# EAGLE board logo (EAGLE 5.04)
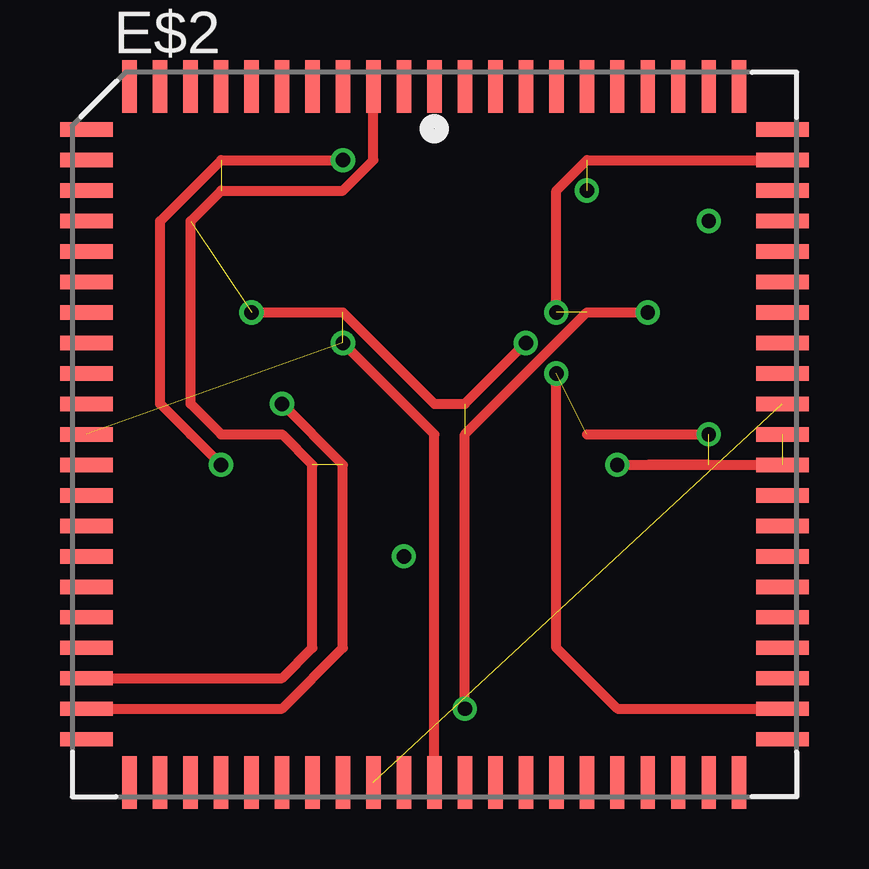
[diagram p0: board, top side]
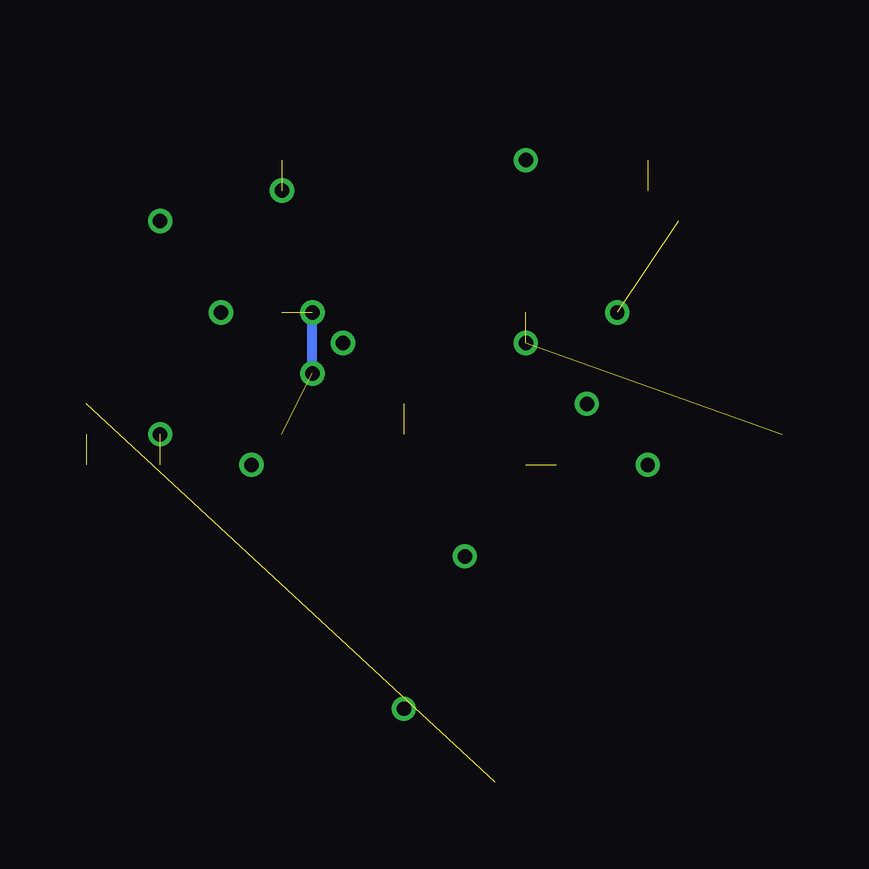
[diagram p1: board, bottom side, seen from below]

No outline drawn. Coordinates in mm, seen from the top.
Copper layers (1*16): Top 0.035mm / dielectric 1.5mm / Bottom 0.035mm
Design rules "default": minimum track width 10mil, minimum drill 24mil, track to track 8mil, track to pad 8mil, pad to pad 8mil, via to via 8mil, smd to smd 8mil, copper to edge 40mil, drill to drill 8mil, minimum pad ring 10mil, minimum via ring 8mil, stop-mask expansion 4mil, vias tented up to drill 0mil, thermal gap 10mil

## Footprints (pad centres in the part's own frame; a part is rotated, then mirrored left to right if it is on the bottom)
PLCC84 = smd 0.6 x 2.2: 1 0,14.5; 2 -1.27,14.5; 3 -2.54,14.5; 4 -3.81,14.5; 5 -5.08,14.5; 6 -6.35,14.5; 7 -7.62,14.5; 8 -8.89,14.5; 9 -10.16,14.5; 10 -11.43,14.5; 11 -12.7,14.5; 33 -12.7,-14.5; 34 -11.43,-14.5; 35 -10.16,-14.5; 36 -8.89,-14.5; 37 -7.62,-14.5; 38 -6.35,-14.5; 39 -5.08,-14.5; 40 -3.81,-14.5; 41 -2.54,-14.5; 42 -1.27,-14.5; 43 0,-14.5; 44 1.27,-14.5; 45 2.54,-14.5; 46 3.81,-14.5; 47 5.08,-14.5; 48 6.35,-14.5; 49 7.62,-14.5; 50 8.89,-14.5; 51 10.16,-14.5; 52 11.43,-14.5; 53 12.7,-14.5; 75 12.7,14.5; 76 11.43,14.5; 77 10.16,14.5; 78 8.89,14.5; 79 7.62,14.5; 80 6.35,14.5; 81 5.08,14.5; 82 3.81,14.5; 83 2.54,14.5; 84 1.27,14.5 | smd 2.2 x 0.6: 12 -14.5,12.7; 13 -14.5,11.43; 14 -14.5,10.16; 15 -14.5,8.89; 16 -14.5,7.62; 17 -14.5,6.35; 18 -14.5,5.08; 19 -14.5,3.81; 20 -14.5,2.54; 21 -14.5,1.27; 22 -14.5,0; 23 -14.5,-1.27; 24 -14.5,-2.54; 25 -14.5,-3.81; 26 -14.5,-5.08; 27 -14.5,-6.35; 28 -14.5,-7.62; 29 -14.5,-8.89; 30 -14.5,-10.16; 31 -14.5,-11.43; 32 -14.5,-12.7; 54 14.5,-12.7; 55 14.5,-11.43; 56 14.5,-10.16; 57 14.5,-8.89; 58 14.5,-7.62; 59 14.5,-6.35; 60 14.5,-5.08; 61 14.5,-3.81; 62 14.5,-2.54; 63 14.5,-1.27; 64 14.5,0; 65 14.5,1.27; 66 14.5,2.54; 67 14.5,3.81; 68 14.5,5.08; 69 14.5,6.35; 70 14.5,7.62; 71 14.5,8.89; 72 14.5,10.16; 73 14.5,11.43; 74 14.5,12.7

## Placement (x,y rotation side)
E$2  [PLCC84]  21.59,20.32 0 top

## Library data of the parts
E$2 = atmel

## Nets
S$2: E$2.3 E$2.55 E$2.63 E$2.64 E$2.73
S$3: E$2.22 E$2.43
S$16: E$2.30 E$2.31
S$17: E$2.41 E$2.65

## Tracks (layer width: path | path; a pad name or v marks a point on that pad's centre or on a via)
S$1  (via drill 0.6)
  other vias: 13.97,25.4
S$2  (via drill 0.6)  (9 unrouted)
  Top 0.406: 33.02,19.05 30.48,19.05 | 33.02,19.05 E$2.63 | v29.21,19.05 33.02,19.05 | 22.86,8.89 22.86,20.32 27.94,25.4 30.48,25.4 | E$2.55 29.21,8.89 26.67,11.43 v26.67,22.86 | 27.94,20.32 33.02,20.32 | E$2.73 27.94,31.75 26.67,30.48 v26.67,25.4 | E$2.3 19.05,31.75 17.78,30.48 12.7,30.48 11.43,29.21 11.43,21.59 12.7,20.32 15.24,20.32 16.51,19.05 | 17.78,31.75 12.7,31.75 10.16,29.21 10.16,21.59 | 13.97,25.4 17.78,25.4 21.59,21.59 22.86,21.59 25.4,24.13 | 10.16,21.59 11.43,20.32 | 10.16,21.59 12.7,19.05
  Bottom 0.406: v26.67,22.86 v26.67,25.4
  other vias: 27.94,30.48 17.78,24.13
S$3  (1 unrouted)
  Top 0.406: E$2.43 21.59,20.32 17.78,24.13
S$4  (via drill 0.6)
  other vias: 26.67,25.4
S$5  (via drill 0.6)
  other vias: 25.4,24.13
S$7  (via drill 0.6)
  other vias: 20.32,15.24
S$8  (via drill 0.6)
  other vias: 12.7,19.05
S$9  (via drill 0.6)
  other vias: 17.78,31.75
S$10  (via drill 0.6)
  other vias: 33.02,29.21
S$11  (via drill 0.6)
  other vias: 30.48,25.4
S$12  (via drill 0.6)
  other vias: 33.02,20.32
S$13  (via drill 0.6)
  other vias: 26.67,22.86
S$14  (via drill 0.6)
  other vias: 27.94,30.48
S$15  (via drill 0.6)
  other vias: 29.21,19.05
S$16  (via drill 0.6)  (1 unrouted)
  Top 0.406: E$2.30 15.24,10.16 16.51,11.43 16.51,19.05 | E$2.31 15.24,8.89 17.78,11.43 17.78,19.05 v15.24,21.59
S$17  (1 unrouted)
S$19  (via drill 0.6)
  other vias: 22.86,8.89